# EAGLE board LPC_LCD_V098 (EAGLE 6.2)
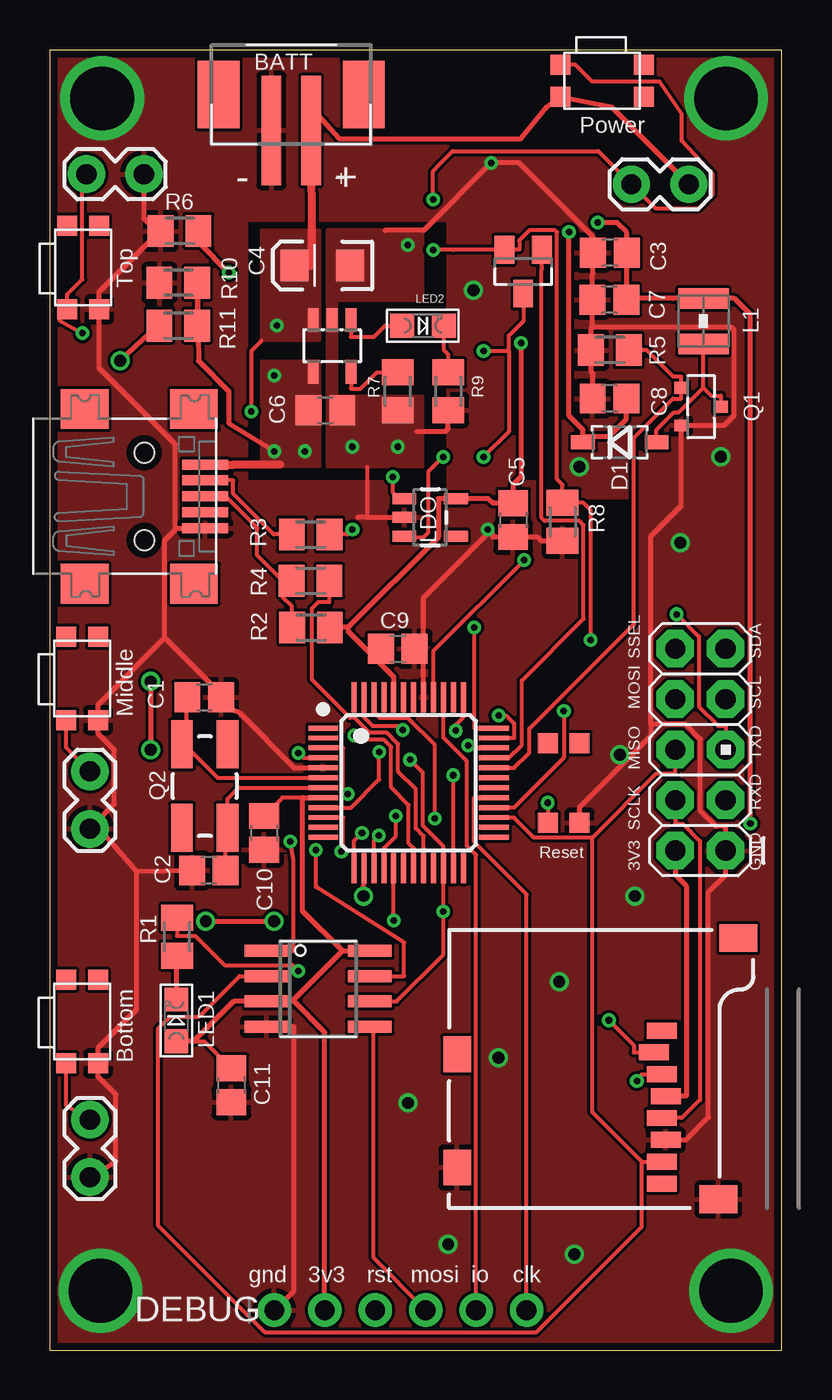
[diagram p0: board, top side]
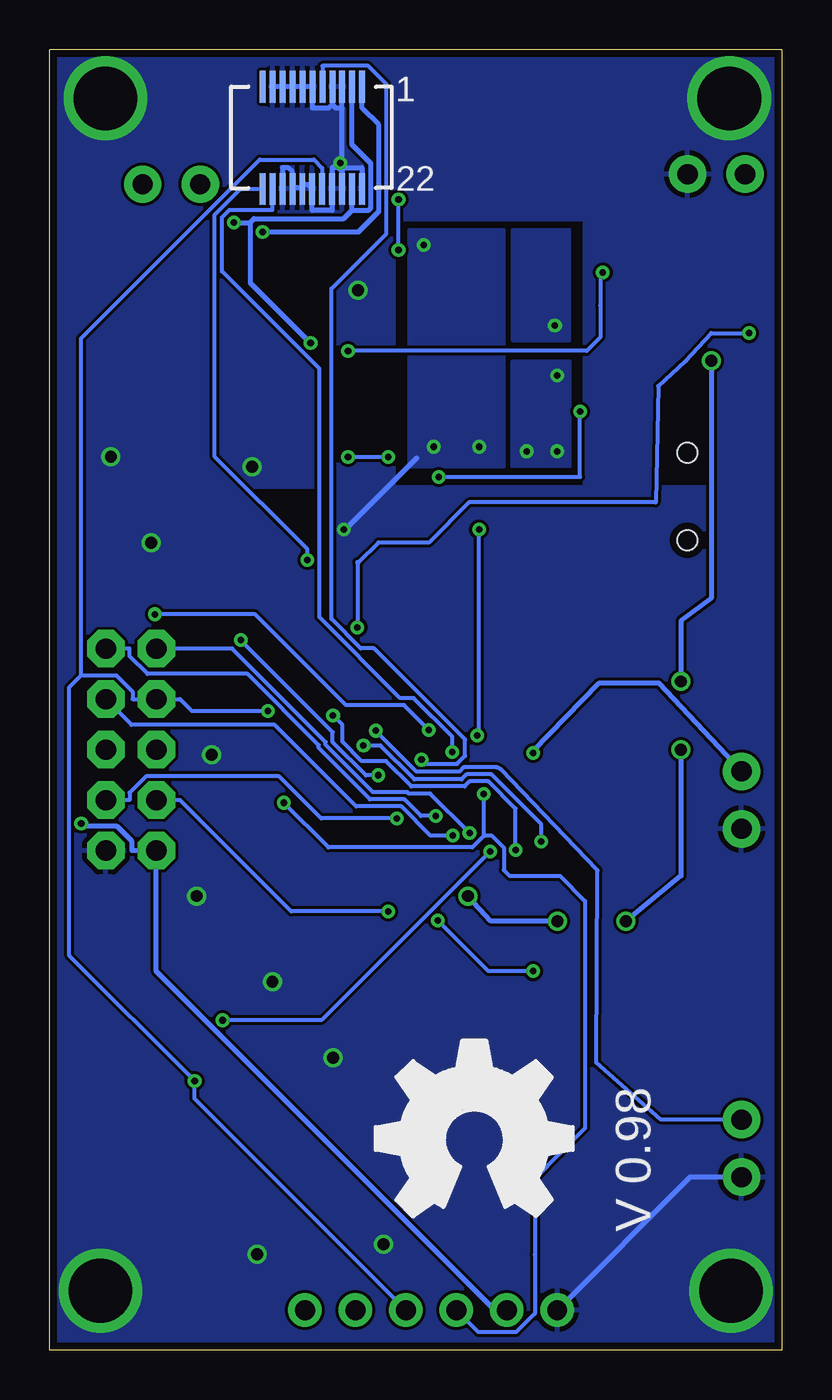
[diagram p1: board, bottom side, seen from below]

Size 36.87 x 65.45 mm. Coordinates in mm from the lower left corner, seen from the top.
Outline: 0,0 36.87,0 36.87,65.45 0,65.45 0,0
Copper layers (1*16): Top 0.0356mm / dielectric 1.5011mm / Bottom 0.0356mm
Design rules: minimum track width 6mil, minimum drill 13mil, track to track 6mil, track to pad 6mil, pad to pad 6mil, via to via 6mil, smd to smd 6mil, copper to edge 15mil, drill to drill 6mil, minimum pad ring 7mil, minimum via ring 7mil, stop-mask expansion 4mil, vias tented up to drill 0mil, thermal gap 10mil
Net classes: 0 default: width 0.152 mm, drill 0.305 mm, clearance 0.152 mm; 1 power: width 0.152 mm, drill 0.305 mm, clearance 0.152 mm

## Footprints (pad centres in the part's own frame; a part is rotated, then mirrored left to right if it is on the bottom)
JST-PH-2-SMT = smd 1 x 5.5: 1 -1,-1.8; 2 1,-1.8 | smd 2.108 x 3.4: NC1 -3.654,0; NC2 3.654,0
C0805 = smd 1.3 x 1.5: 1 -0.85,0; 2 0.85,0
EIA3216 = smd 1.4 x 1.6: A 1.4,0; C -1.4,0
SOD-123 = smd 1.2 x 0.7: A 1.85,0; C -1.85,0
1X06_ROUND = drill 1 pad 1.676: 1 -6.35,0; 2 -3.81,0; 3 -1.27,0; 4 1.27,0; 5 3.81,0; 6 6.35,0
SOT23-5L = smd 0.55 x 1.2: 1 -0.95,-1.3; 2 0,-1.3; 3 0.95,-1.3; 4 0.95,1.3; 5 -0.95,1.3
AVR_ICSP = drill 1.016 pad 1.88 octagon: 1 -1.27,5.08; 2 1.27,5.08; 3 -1.27,2.54; 4 1.27,2.54; 5 -1.27,0; 6 1.27,0; 7 -1.27,-2.54; 8 1.27,-2.54; 9 -1.27,-5.08; 10 1.27,-5.08
1X02_LOCK = drill 1.016 pad 1.88: 1 -0.178,0; 2 2.718,0
WE-KI_1008_B = smd 1.02 x 2.54: 1 -1.145,0; 2 1.145,0
SOT23-5 = smd 0.55 x 1.2: 1 -0.95,-1.3; 2 0,-1.3; 3 0.95,-1.3; 4 0.95,1.3; 5 -0.95,1.3
CHIPLED_0805 = smd 1.2 x 1.2: A 0,-1.05; C 0,1.05
SOT23-R = smd 0.6 x 0.7: 1 -0.95,-1; 2 0.95,-1; 3 0,1
CRYSTAL-SMD-5X3 = smd 2.408 x 1.1: 1 -2.104,-1.15; 2 2.104,-1.15; 3 2.104,1.15; 4 -2.104,1.15
M0805 = smd 1.3 x 1.6: 1 -0.95,0; 2 0.95,0
SWITCH_KMR4 = smd 1 x 1: P$1 2,0.8; P$2 -2,0.8; P$3 2,-0.8; P$4 -2,-0.8
MICRO-SD-SOCKET-PP = smd 0.8 x 1.5: 1 -8.94,10.7; 2 -7.84,10.3; 3 -6.74,10.7; 4 -5.64,10.9; 5 -4.54,10.7; 6 -3.44,10.9; 7 -2.34,10.7; 8 -1.24,10.7 | smd 1.8 x 1.4: CD1 -2.05,0.4; CD2 -7.75,0.4 | smd 1.4 x 1.9: GND1 -13.6,14.55; GND3 -0.45,13.55
SWITCH_KMS_WIDE = smd 1.002 x 1: P$1 2.101,0.8; P$2 -2.101,0.8; P$3 2.101,-0.8; P$4 -2.101,-0.8
LQFP48 = smd 1.5 x 0.25: 1 -4.3,2.75; 2 -4.3,2.25; 3 -4.3,1.75; 4 -4.3,1.25; 5 -4.3,0.75; 6 -4.3,0.25; 7 -4.3,-0.25; 8 -4.3,-0.75; 9 -4.3,-1.25; 10 -4.3,-1.75; 11 -4.3,-2.25; 12 -4.3,-2.75; 25 4.3,-2.75; 26 4.3,-2.25; 27 4.3,-1.75; 28 4.3,-1.25; 29 4.3,-0.75; 30 4.3,-0.25; 31 4.3,0.25; 32 4.3,0.75; 33 4.3,1.25; 34 4.3,1.75; 35 4.3,2.25; 36 4.3,2.75 | smd 0.25 x 1.5: 13 -2.75,-4.3; 14 -2.25,-4.3; 15 -1.75,-4.3; 16 -1.25,-4.3; 17 -0.75,-4.3; 18 -0.25,-4.3; 19 0.25,-4.3; 20 0.75,-4.3; 21 1.25,-4.3; 22 1.75,-4.3; 23 2.25,-4.3; 24 2.75,-4.3; 37 2.75,4.3; 38 2.25,4.3; 39 1.75,4.3; 40 1.25,4.3; 41 0.75,4.3; 42 0.25,4.3; 43 -0.25,4.3; 44 -0.75,4.3; 45 -1.25,4.3; 46 -1.75,4.3; 47 -2.25,4.3; 48 -2.75,4.3
SOT23 = smd 1 x 1.4: 1 -0.95,-1.1; 2 0.95,-1.1; 3 0,1.1
SOIC8 = smd 0.6 x 2.2: 1 -1.905,-2.6; 2 -0.635,-2.6; 3 0.635,-2.6; 4 1.905,-2.6; 5 1.905,2.6; 6 0.635,2.6; 7 -0.635,2.6; 8 -1.905,2.6
PETERATMEGA644_NOKIA6101_LCD = smd 0.3 x 1.6: 1 2.246,2.635; 2 1.746,2.635; 3 1.246,2.635; 4 0.746,2.635; 5 0.246,2.635; 6 -0.254,2.635; 7 -0.754,2.635; 8 -1.254,2.635; 9 -1.754,2.635; 10 -2.254,2.635; 11 -2.754,2.635; 12 -2.765,-2.51; 13 -2.265,-2.51; 14 -1.765,-2.51; 15 -1.265,-2.51; 16 -0.765,-2.51; 17 -0.265,-2.51; 18 0.235,-2.51; 19 0.735,-2.51; 20 1.235,-2.51; 21 1.735,-2.51; 22 2.235,-2.51
USB-MINIB = smd 0.5 x 2.308: D+ 0,4.064; D- -0.8,4.064; GND 1.6,4.064; ID 0.8,4.064; VBUS -1.6,4.064 | smd 2 x 2.4: GND1 -4.4,-2; GND2 -4.4,3.5; GND3 4.4,3.5; GND4 4.4,-2 | hole 1: -2.2,1; 2.2,1

## Placement (x,y rotation side)
BATT  [JST-PH-2-SMT]  12.16,63.18 0 top
C1  18pf  [C0805]  7.78,32.86 0 top
C2  18pf  [C0805]  8.02,24.15 180 top
C3  1uf  [C0805]  28.21,55.23 180 top
C4  4.7uf  [EIA3216]  13.72,54.58 180 top
C5  .1uf  [C0805]  23.34,41.78 270 top
C6  1uf  [C0805]  13.88,47.31 0 top
C7  .1uf  [C0805]  28.18,52.87 180 top
C8  1uf  [C0805]  28.19,47.89 180 top
C9  .1uf  [C0805]  17.53,35.31 0 top
C10  .1uf  [C0805]  10.79,26.04 270 top
C11  .1uf  [C0805]  9.14,13.34 270 top
D1  [SOD-123]  28.71,45.69 0 top
DEBUG  [1X06_ROUND]  17.66,2.02 0 top
IC1  MCP73831  [SOT23-5L]  14.22,50.55 180 top
JP1  M05X2PTH  [AVR_ICSP]  32.77,30.23 180 top
JP2  [1X02_LOCK]  2.03,26.42 90 top
JP3  [1X02_LOCK]  4.57,59.18 180 top
JP4  [1X02_LOCK]  2.03,8.89 90 top
JP5  [1X02_LOCK]  29.46,58.67 0 top
L1  100uH  [WE-KI_1008_B]  32.92,51.79 270 top
LDO  S-L2980A33MC-TF-G  [SOT23-5]  19.15,41.91 270 top
LED1  Blue  [CHIPLED_0805]  6.38,16.6 0 top
LED2  Green  [CHIPLED_0805]  18.8,51.56 270 top
LOGO1  OSHW_LOGO_FILLX0350-NT  [OSHW_FILLX350_NOTEXT]  20.45,6.73 0 bottom
Q1  [SOT23-R]  32.8,47.49 270 top
Q2  12Mhz  [CRYSTAL-SMD-5X3]  7.8,28.39 270 top
R1  100  [M0805]  6.42,20.81 270 top
R2  1.5k  [M0805]  13.16,36.38 180 top
R3  22  [M0805]  13.14,41.05 180 top
R4  22  [M0805]  13.13,38.72 180 top
R5  4K7  [M0805]  28.21,50.33 0 top
R6  1M  [M0805]  6.54,56.32 0 top
R7  2K  [M0805]  17.53,48.26 270 top
R8  47K  [M0805]  25.82,41.69 90 top
R9  470  [M0805]  20.07,48.26 90 top
R10  100K  [M0805]  6.48,53.72 0 top
R11  10K  [M0805]  6.48,51.56 180 top
RESET  RST  [SWITCH_KMR4]  25.88,28.55 270 top
U1  MICROSD  [MICRO-SD-SOCKET-PP]  20.12,7.15 270 top
U2  POWER  [SWITCH_KMS_WIDE]  27.82,63.88 180 top
U3  1343  [LQFP48]  18.07,28.56 0 top
U4  U4  [SOT23]  23.84,54.28 180 top
U5  TOP  [SWITCH_KMS_WIDE]  1.69,54.48 270 top
U6  BOTTOM  [SWITCH_KMS_WIDE]  1.64,16.54 270 top
U7  RIGHT  [SWITCH_KMS_WIDE]  1.64,33.81 270 top
U$1  spiflash  [SOIC8]  13.52,18.19 270 top
U$3  PETERATMEGA644_NOKIA6101_LCD  [PETERATMEGA644_NOKIA6101_LCD]  23.38,60.95 0 bottom
X1  UX60-MB-5ST  [USB-MINIB]  3.77,42.97 270 top

## Library data of the parts
BATT Q2 RESET U2 U5-U7 = mylib
C1-C3 C5-C11 IC1 R1-R11 X1 = adafruit
C4 JP1-JP5 U1 = SparkFun
D1 DEBUG LED1 LED2 Q1 = microbuilder
L1 LDO U4 U$1 = PeterAtMega644
LOGO1 = ohw-logo
U3 = microbuilder; DIGIKEY#: 568-4950-ND; MANF: NXP; MANF#: LPC1114FBD48/301,1
U$3 = hirosecon

## Nets
5V [power]: C6.1 IC1.4 R10.2 R11.1 X1.VBUS
ADC: U3.30
BACKLIGHT: Q1.1 R5.2 U3.32
BOTTOM_B: JP4.2 U3.37 U6.P$3
DB4: U3.18
DB5: U3.21
EN: LDO.3 R6.2 U4.3
FLASHCS: U3.34 U$1.1
FLASHHOLD: U3.35 U$1.7
GND [power]: BATT.1 C1.2 C2.2 C3.2 C4.C C5.2 C6.2 C7.2 C8.2 C9.2 C10.2 C11.2 DEBUG.1 IC1.2 JP1.1 JP2.1 JP3.1 JP4.1 LDO.2 Q1.2 R5.1 R6.1 R7.2 R8.1 R9.1 R10.1 RESET.P$1 U1.6 U1.CD1 U1.GND3 U3.5 U3.41 U5.P$1 U6.P$1 U7.P$1 U$1.4 U$3.3 U$3.4 U$3.6 U$3.7 U$3.8 U$3.9 U$3.10 U$3.14 U$3.15 U$3.16 U$3.17 U$3.19 U$3.20 U$3.22 X1.GND
LCD_CS: U3.9 U$3.13
LCD_RS: R1.1 U3.17
LCD_RST: U3.40 U$3.12
LCD_WR: U3.42
LED+ [power]: C8.1 D1.C U$3.1
LIPO [power]: BATT.2 C4.A IC1.3 JP5.2 LDO.1 U2.P$1
MIDDLE_B: JP2.2 U3.4 U7.P$3
MISO: JP1.6 U1.7 U3.27 U$1.2
MMCCS: U1.2 U3.10
MOSI: DEBUG.4 JP1.8 U1.3 U3.28 U$1.5 U$3.18
N$1: C2.1 Q2.3 U3.7
N$2: R3.1 U3.19
N$3: R4.1 U3.20
N$4: LED1.C R1.2
N$5: U3.12
N$6: D1.A L1.2 Q1.3
N$7: IC1.5 R7.1
N$8: IC1.1 LED2.A
N$9: LED2.C R9.2
N$10: U3.24
POWER_B: JP5.1 R8.2 U2.P$3 U3.23 U4.2
REGEN: U3.33 U4.1
RESET: DEBUG.3 RESET.P$3 U3.3
RTS: U3.45
RXD: JP1.3 U3.46
SCL: JP1.7 U3.15
SCLK: JP1.4 U1.5 U3.22 U$1.6 U$3.5
SDA: JP1.9 U3.16
SSEL: JP1.10 U3.13
SWCLK: DEBUG.6 U3.29
SWDIO: DEBUG.5 U3.39
TOP_B: JP3.2 U3.36 U5.P$3
TXD: JP1.5 U3.47
USB_DM: R3.2 X1.D-
USB_DP: R2.2 R4.2 X1.D+
USBVBUS [power]: R11.2 U3.14
VCC [power]: C3.1 C5.1 C7.1 C9.1 C10.1 C11.1 DEBUG.2 JP1.2 L1.1 LDO.5 LED1.A R2.1 U1.4 U3.8 U3.44 U$1.3 U$1.8 U$3.2 U$3.21
XTAL1: C1.1 Q2.1 U3.6

## Tracks (layer width: path | path; a pad name or v marks a point on that pad's centre or on a via)
5V  (via drill 0.33 pad 0.69)
  Top 0.254: 9.27,44.57 9.28,44.58 | R11.1 R10.2 7.49,49.78 9.02,48.26 9.02,46.65 v11.32,45.24
  Top 0.406: X1.VBUS 9.27,44.57 | 9.28,44.58 11.62,44.58
  other vias: 12.85,45.24 11.32,49.05
  pour Top (no thermals): 13.59,49.78 13.59,44.45 10.67,44.45 10.67,49.78
  pour Bottom: 13.59,44.45 13.59,49.78 10.67,49.78 10.67,44.45
BACKLIGHT
  Top 0.203: R5.2 30.06,50.33 31.4,48.99 31.8,48.99 Q1.1 31.8,47.88 31.38,47.88 29.42,45.91 29.42,36.55 24.15,31.28 24.15,30.08 23.38,29.31 U3.32
BOTTOM_B  (via drill 0.33 pad 0.69)
  Top 0.203: v20.45,31.18 20.45,31.48 20.82,31.86 U3.37 | JP4.2 0.84,12.29 U6.P$3
  Bottom 0.203: v20.45,31.18 18.39,29.12 16.24,29.12 16.02,29.34 14.36,29.34 14.16,29.23 9.29,24.16 9.35,14.48 6.09,11.61 JP4.2
EN  (via drill 0.33 pad 0.69)
  Top 0.203: v19.81,44.96 19.3,44.45 19.05,44.2 19.05,41.15 18.8,40.89 18.03,40.89 LDO.3 | v21.84,44.96 23.11,46.23 23.11,50.29 | 23.11,50.29 23.11,51.05 23.88,51.82 23.88,53.09 U4.3 | v21.84,50.29 23.11,50.29
  Top 0.254: R6.2 7.49,55.76 v9.02,54.23
  Bottom 0.203: v21.84,44.96 v19.81,44.96 | v9.02,54.23 9.14,54.23 9.14,52.57 9.14,50.98 9.83,50.29 v21.84,50.29
FLASHCS  (via drill 0.33 pad 0.69)
  Top 0.203: v12.11,25.61 12.27,24.69 12.27,20.09 U$1.1 | U3.34 21.19,30.31 v21.07,30.43
  Bottom 0.203: v21.07,30.43 20.2,30.43 18.5,28.73 16.13,28.73 15.88,28.98 14.63,28.98 12.11,26.46 v12.11,25.61
FLASHHOLD  (via drill 0.33 pad 0.69)
  Top 0.203: v22.6,31.95 22.97,31.95 23.38,31.54 23.38,30.81 U3.35 | v13.41,25.18 13.41,23.32 17.85,20.52 17.85,18.82 U$1.7
  Bottom 0.203: v13.41,25.18 13.41,27.25 14.78,28.63 15.73,28.63 15.98,28.38 18.65,28.38 19.93,29.65 21.15,29.65 22.13,30.63 22.13,31.48 v22.6,31.95
GND  (via drill 0.33 pad 0.69, 0.6 pad 0.69, 3.2)
  Top 0.203: 16,41.91 16,44.45
  Top 0.254: U3.5 12.32,29.31 9.53,32.09 9.03,32.31 | JP3.1 4.75,56.94 5.01,56.68 R6.1 5.01,55.79 2.49,53.27 2.49,53.21 U5.P$1 2.49,49.42 6.32,45.59 6.32,41.45 6.4,41.37 | 27.33,51.49 34.32,51.49 34.47,51.33 34.47,47.05 33.96,46.54 Q1.2 31.8,42.5 30.28,40.97 30.28,31.5 | 27.33,51.49 27.26,51.41 R5.1 27.26,49.25 27.34,49.17 C8.2 | 27.33,51.49 C7.2 27.33,54.18 27.36,54.2 C3.2 27.36,56.03 23.64,59.75 v22.23,59.75 18.84,56.36 16.9,56.36 | 15.53,41.91 16,41.91 LDO.2 | 2.28,26.49 JP2.1 | 2.28,26.49 3.26,27.47 3.26,30.21 2.44,31.03 U7.P$1 2.44,32.49 5.79,35.84 | 4.38,24.1 2.28,26.49 | 4.38,24.1 4.38,17.16 2.44,15.22 U6.P$1 2.44,13.76 3.33,12.88 3.33,9.5 JP4.1 | 4.38,24.1 C2.2 | 30.28,31.5 32.02,31.5 32.77,30.75 32.77,27.13 33.53,26.36 34.04,26.36 JP1.1 34.04,23.93 33.17,23.06 33.17,11.72 32.05,10.59 U1.6 | 30.28,31.5 30.28,30.93 26.68,27.33 RESET.P$1 | U3.41 18.82,37.87 22.06,41.11 v22.06,41.31 22.31,41.06 22.31,40.93 C5.2 24.56,40.93 24.74,40.74 R8.1 | R9.1 20.07,46.38 19.91,46.23 18.48,46.23 | U$1.4 12.3,16.29 12.3,3.01 DEBUG.1 | 6.4,41.37 5.79,40.76 5.79,35.84 | 5.79,35.84 8.8,32.83 | 6.4,41.37 X1.GND
  Bottom 0.254: 22.63,62.68 22.81,62.5 23.63,62.5 U$3.6 U$3.7 U$3.8 U$3.9 U$3.10 | 22.63,62.68 U$3.4 | 22.63,62.68 22.46,62.5 22.13,62.5 | 22.15,59.34 22.32,59.52 22.65,59.52 U$3.19 22.65,57.36 23.65,57.36 U$3.17 23.86,58.66 24.15,58.66 24.15,58.49 | 22.15,59.34 22.15,59.52 22.13,59.52 | 22.15,59.34 U$3.20 | 22.13,59.52 21.15,59.52 U$3.22 | 22.13,59.75 22.13,59.52 | v22.23,59.75 22.13,59.75 | 22.13,59.75 22.13,62.5 | 24.65,58.49 U$3.15 | 24.15,58.49 U$3.16 | 24.15,58.49 24.65,58.49 | 18.38,44.91 21.98,41.31 v22.06,41.31 | 24.65,58.49 24.65,59.3 24.86,59.52 25.15,59.52 U$3.14 | JP4.1 4.62,8.71 DEBUG.1 | 22.13,62.5 U$3.3
  other vias: 18.03,55.63 17.53,45.47 15.24,45.47 26.42,4.83 25.65,18.54 20.07,5.33 18.03,12.45 31.75,40.64 29.46,22.86 22.61,14.73 28.7,29.97 26.67,44.45 21.34,53.34 33.78,44.96 2.65,63 34.06,63 2.56,3 34.31,3
  pour Top (no thermals): 18.8,56.39 13.97,56.39 13.97,51.82 14.48,51.82 14.48,52.83 18.8,52.83
  pour Top (no thermals): 13.97,53.09 13.97,44.45 18.8,44.45 18.8,48.01 14.48,48.01 14.48,53.09
  pour Bottom: 18.8,56.39 18.8,44.45 13.97,44.45 13.97,56.39
  pour Bottom: -0.25,65.79 -0.25,42.93 9.91,42.93 9.91,56.9 18.8,56.9 19.56,56.9 19.56,43.43 37.85,43.43 37.85,44.2 37.85,65.79
  pour Bottom: -0.25,43.43 37.85,43.43 37.85,-0.25 -0.25,-0.25
  pour Top: -0.25,65.79 -0.25,-0.25 36.58,-0.25 36.58,43.69 9.91,43.69 9.91,65.79
  pour Top: 9.91,65.79 9.91,56.9 20.07,56.9 20.07,42.93 36.58,42.93 36.58,65.79
LCD_CS  (via drill 0.33 pad 0.69)
  Top 0.203: v16.59,30.11 16.59,28.73 15.18,27.31 14.78,27.31 U3.9
  Bottom 0.203: v16.59,30.11 16.59,30.88 18.54,32.82 19.22,32.82 23.29,36.89 23.29,49.39 28.18,54.29 28.18,57.01 27.81,57.38 25.65,57.38 U$3.13
LCD_RS  (via drill 0.33 pad 0.69)
  Top 0.203: v17.32,21.62 U3.17 | R1.1 6.42,20.86 7.32,20.86 8.8,19.38 12.22,19.38 v12.52,19.08
  Bottom 0.203: v12.52,19.08 14.78,19.08 v17.32,21.62
LCD_RST  (via drill 0.33 pad 0.69)
  Top 0.203: U3.40 19.32,35.19 v23.89,39.76
  Bottom 0.203: U$3.12 27.26,58.44 28.55,57.15 28.55,44.96 23.89,40.3 v23.89,39.76
LED+  (via drill 0.33 pad 0.69)
  Top 0.254: C8.1 29.04,46.86 28.18,46.01 26.86,46.01 | 26.86,46.01 26.86,46.32 26.15,47.03 v26.15,56.28 | D1.C 26.86,46.01
  Bottom 0.254: v26.15,56.28 21.33,56.28 20.29,57.31 20.29,61.66 21.13,62.5 U$3.1
LIPO  (via drill 0.33 pad 0.69)
  Top 0.203: 10.67,50.8 10.16,50.29 v10.16,47.24 | v17.27,43.94 17.27,43.18 17.78,42.67 LDO.1
  Top 0.254: 13.32,62.38 14.58,60.97 23.72,60.97 25.04,62.57 U2.P$1 28.28,62.57 JP5.2
  Top 0.406: 13.32,62.38 13.16,63.65 BATT.2 13.16,58.93 13.21,58.04 13.21,54.58 C4.A
  Bottom 0.203: v10.16,47.24 10.16,43.94 v17.27,43.94
  other vias: 11.43,51.56
  pour Top (no thermals): 13.59,56.39 13.59,50.8 10.67,50.8 10.67,56.39
  pour Bottom: 13.59,56.39 13.59,50.8 10.67,50.8 10.67,56.39
MIDDLE_B  (via drill 0.33 pad 0.69)
  Top 0.203: v12.52,30.06 12.77,29.81 U3.4 | U7.P$3 0.84,30.33 JP2.2
  Bottom 0.254: v12.52,30.06 12.52,30.15 9.19,33.59 6.21,33.59 JP2.2
MISO
  Top 0.203: 29.81,9.49 27.32,11.98 27.32,25.8 | 27.32,25.8 30.56,29.03 31.5,29.03 JP1.6 | 27.32,25.8 24.39,25.8 23.38,26.81 U3.27 | 29.81,9.49 29.81,6.22 24.5,0.91 10.83,0.91 5.47,6.27 5.47,16.21 6.06,16.8 7.53,16.8 9.56,18.82 U$1.2 | 29.81,9.49 U1.7
MMCCS  (via drill 0.33 pad 0.69)
  Top 0.203: v14.7,25.1 14.78,25.18 14.78,26.81 U3.10 | U1.2 29.41,14.99 29.41,15.35 v28.16,16.61
  Bottom 0.203: v28.16,16.61 23.18,16.61 v14.7,25.1
MOSI  (via drill 0.33 pad 0.69)
  Top 0.203: U3.28 23.38,27.31 25.89,29.82 v25.89,32.18 | v29.57,13.55 29.81,13.8 29.81,13.89 U1.3 | DEBUG.4 16.31,4.64 16.31,16.29 U$1.5
  Bottom 0.203: v25.89,32.18 29.71,32.18 30.3,32.77 JP1.8 32.69,32.77 32.69,33.14 33.51,33.96 35.28,33.96 | 35.28,33.96 35.88,33.37 35.88,19.86 v29.57,13.55 29.57,12.66 DEBUG.4 | 35.28,33.96 35.28,50.92 26.29,59.91 23.57,59.91 23.15,59.49 U$3.18
N$1
  Top 0.203: C2.1 8.87,25.25 8.96,25.34 Q2.3 8.96,27.75 9.52,28.31 U3.7
N$2  (via drill 0.33 pad 0.69)
  Top 0.203: v15.34,30.93 15.56,30.71 16.84,30.71 17.19,30.36 17.19,28.32 18.08,27.43 18.08,25.51 18.32,25.26 U3.19 | v15.25,41.31 15,41.05 R3.1
  Bottom 0.203: v15.25,41.31 15.25,31.02 v15.34,30.93
N$3
  Top 0.203: R4.1 14.08,37.66 13.53,37.66 13.2,37.33 13.2,33.74 15.12,31.82 15.35,31.82 16.11,31.07 16.99,31.07 17.55,30.51 17.55,29.12 18.43,28.23 18.43,26.26 18.82,25.87 18.82,25.26 U3.20
N$4
  Top 0.254: LED1.C R1.2
N$6
  Top 0.203: Q1.3 33.8,48.04 33.31,48.04 32.92,48.43 | 32.92,48.43 31.68,47.19 31.44,47.19 30.56,46.31 D1.A | 32.92,48.43 32.92,50.26 L1.2
N$7
  Top 0.203: R7.1 16.47,49.21 15.65,48.39 15.17,48.39 IC1.5
N$8
  Top 0.203: LED2.A 16.89,51.56 16.32,50.99 15.17,50.99 IC1.1
N$9
  Top 0.203: R9.2 20.07,50.11 19.85,50.33 LED2.C
POWER_B  (via drill 0.33 pad 0.69)
  Top 0.203: U3.23 v20.32,28.94 | v27.24,35.74 27.24,42.28 26.88,42.64 R8.2 25.82,43.55 25.55,43.82 25.55,56.26 25.46,56.35 24.15,56.35 23.65,55.85 23.65,55.38 U4.2 20.64,55.38 20.32,55.37 v19.3,55.37 | U2.P$3 26.48,64.68 27.32,63.84 30.71,63.84 31.83,62.21 31.83,60.86 33.38,59.18 33.38,58.16 32.69,57.47 30.49,57.47 JP5.1 27.62,60.34 20.29,60.34 19.64,59.69 19.3,59.33 v19.3,57.91
  Bottom 0.203: v27.24,35.74 22.61,31.11 22.61,30.61 20.94,28.94 v20.32,28.94 | v19.3,55.37 v19.3,57.91
REGEN
  Top 0.203: U4.1 24.79,54.43 24.77,54.4 24.77,41.89 24.92,41.74 26.66,41.74 26.88,41.52 26.88,36.81 23.77,33.7 23.77,30.45 23.12,29.81 U3.33
RESET  (via drill 0.33 pad 0.69)
  Top 0.203: v25.08,27.55 25.08,27.31 RESET.P$3 | v15.02,28 14.78,28.24 14.78,30.31 U3.3
  Bottom 0.203: DEBUG.3 15.28,0.92 13.38,0.92 12.58,1.72 12.45,1.85 12.45,4.83 12.45,8.64 11.18,9.91 9.91,11.18 9.91,22.61 11.18,23.88 13.72,23.88 14,24.16 14,25.3 14.6,25.89 15,25.89 | v15.02,28 15,27.97 15,25.89 | 15,25.89 15.59,25.3 22.83,25.3 v25.08,27.55
RXD  (via drill 0.33 pad 0.69)
  Top 0.203: U3.46 16.32,32.12 16.64,31.81 18.05,31.81 19.4,30.46 v19.4,26.77
  Bottom 0.203: v19.4,26.77 23.19,26.77 25.31,28.88 32.02,28.88 32.84,28.06 32.84,27.69 JP1.3 | v19.4,26.77
SCL  (via drill 0.33 pad 0.69)
  Top 0.203: v16.57,25.9 16.32,25.65 16.32,25.26 U3.15
  Bottom 0.203: v16.57,25.9 17.69,25.9 19.16,27.37 21.43,27.37 25.54,31.48 32.75,31.48 JP1.7
SCLK  (via drill 0.33 pad 0.69)
  Top 0.203: v18.14,29.72 18.79,29.07 18.79,26.4 19.82,25.37 19.82,25.26 U3.22 v19.82,22.08 19.82,19.91 17.47,17.55 U$1.6 | U1.5 31.82,11.69 32.74,12.6 32.74,25.62 31.87,26.49 31.5,26.49 JP1.4
  Bottom 0.203: v18.14,29.72 17.93,29.51 16.36,29.51 15.95,29.91 15.95,30.74 20.54,35.33 21.21,35.33 22.68,36.8 22.68,53.42 19.91,56.19 19.91,63.72 20.82,64.63 23.13,64.63 U$3.5 | JP1.4 30.3,27.69 24.7,22.08 v19.82,22.08
SDA  (via drill 0.33 pad 0.69)
  Top 0.203: v17.43,26.89 17.43,25.87 16.82,25.26 U3.16
  Bottom 0.203: v17.43,26.89 18.17,26.89 19.01,27.73 20.74,27.73 23.32,30.31 23.32,30.45 26.91,34.04 31.94,34.04 32.84,34.94 32.84,35.31 JP1.9
SSEL  (via drill 0.33 pad 0.69)
  Top 0.203: U3.13 15.32,25.63 v15.73,26.04
  Bottom 0.203: v15.73,26.04 17.71,28.02 18.8,28.02 18.86,28.08 20.59,28.08 22.97,30.46 22.97,30.6 27.67,35.31 30.3,35.31 | 30.3,35.31 | 30.3,35.31 JP1.10
SWCLK
  Top 0.203: U3.29 21.37,27.81 21.37,25.58 24.01,22.94 DEBUG.6
SWDIO
  Top 0.203: DEBUG.5 21.47,24.93 21,25.4 21,29.65 19.82,30.83 19.82,31.86 U3.39 | DEBUG.5
TOP_B  (via drill 0.33 pad 0.69)
  Top 0.203: v21.37,36.38 21.37,31.31 U3.36 | JP3.2 1.65,58.97 1.65,53.89 0.89,53.13 U5.P$3 0.76,52.58 0.51,52.32 0.51,51.82 v1.65,51.18
  Bottom 0.203: 21.37,39.62 v21.37,36.38 | 21.37,39.62 21.37,39.67 | v1.65,51.18 3.56,51.18 4.83,49.78 6.22,48.51 6.35,42.67 15.75,42.67 17.78,40.64 20.32,40.64 21.34,39.62 21.37,39.62
TXD  (via drill 0.33 pad 0.69)
  Top 0.203: v17.77,31.21 17.56,31.42 16.26,31.42 15.82,31.86 U3.47 | JP1.5 34.04,31.42 33.66,31.42 32.69,32.4 32.69,35.92 v31.57,37.04
  Bottom 0.203: v31.57,37.04 26.52,37.04 21.95,32.47 19.03,32.47 v17.77,31.21
USB_DM
  Top 0.203: X1.D- 9.24,43.77 9.24,43.1 11.29,41.05 R3.2
USB_DP
  Top 0.203: X1.D+ 8.87,42.97 10.45,41.39 10.45,40 11.73,38.72 | R2.2 12.21,37.43 11.73,37.9 11.73,38.72 | 11.73,38.72 R4.2
USBVBUS  (via drill 0.6)
  Top 0.203: 15.83,24 U3.14
  Top 0.254: R11.2 5.4,51.5 v3.56,49.78 | v5.08,33.66 v5.08,30.23 | v15.8,22.86 15.83,24 | v7.87,21.59 v11.3,21.6
  Bottom 0.254: v3.56,49.78 3.56,37.85 5.08,36.7 v5.08,33.66 | v5.08,30.23 5.08,23.88 v7.87,21.59 | v11.3,21.6 14.65,21.6 v15.8,22.86
VCC  (via drill 0.33 pad 0.69)
  Top 0.203: 12.74,27.81 11.72,27.81 C10.1 | 7.26,15.55 7.78,15.55 C11.1 | C9.1 16.68,34.54 16.72,34.5
  Top 0.254: 14.74,20.09 12.3,17.65 12.3,17.55 | v23.73,50.68 23.73,43.95 23.34,43.56 C5.1 23.3,42.63 22.31,42.63 22.08,42.86 LDO.5 19.57,42.86 19.57,40.92 15.04,36.38 | 15.04,36.38 R2.1 | U3.44 17.32,33.89 16.72,34.5 15.04,36.18 15.04,36.38 | 14.74,20.09 12.74,22.09 12.74,27.81 U3.8 | DEBUG.2 13.85,16 12.3,17.55 | 12.3,17.55 U$1.3 9.26,17.55 7.26,15.55 LED1.A | 29.5,52.93 29.06,53.37 C3.1 29.06,56.26 28.57,56.75 v27.59,56.75 | 29.5,52.93 29.5,52.87 C7.1 | 29.5,52.93 31.37,52.93 L1.1 34.47,52.93 35.28,52.12 v35.28,26.5 | 14.74,20.09 U$1.8 | U1.4 32.05,12.79 32.05,23.38 31.5,23.93 JP1.2
  Bottom 0.254: 26.77,56.75 26.57,56.94 22.06,56.94 21.65,57.36 | v23.73,50.68 26.77,53.72 26.77,56.75 | v27.59,56.75 26.77,56.75 | DEBUG.2 14.45,2.02 31.5,19.07 JP1.2 32.72,25.15 32.72,25.6 33.48,26.36 35.14,26.36 v35.28,26.5 | 21.65,57.36 20.82,57.36 20.7,57.48 20.7,59.72 21.63,60.66 U$3.2 | 21.65,57.36 U$3.21
XTAL1
  Top 0.203: 6.65,30.84 6.65,30.62 8.47,28.81 U3.6 | 6.65,30.84 6.65,31.45 6.9,31.69 C1.1 | Q2.1 6.65,30.84

## Text on the board
tPlace: + | gnd | 3v3 | rst | mosi | io | clk
tNames: Power | Top | SSEL | SDA | MOSI | SCL | Middle | TXD | MISO | RXD | SCLK | Reset | 3V3 | GND | Bottom
bNames: V 0.98